# EAGLE board Cap-Dreh (EAGLE 3.55)

No outline drawn. Coordinates in mm, seen from the top.
Copper layers used: 

## Footprints (pad centres in the part's own frame; a part is rotated, then mirrored left to right if it is on the bottom)
8/1 = drill 1.422 pad 2.184 octagon:  -3.5,0;  3.5,0;  0,-3.5 | hole 3.81: 0,0
8/2 = drill 1.422 pad 2.184 octagon:  -2.5,2.54;  2.5,2.54;  0,-4.96 | hole 3.81: -0.04,0
8/3 = drill 1.422 pad 2.184 octagon:  -5,0;  5,0;  0,-5 | hole 3.81: 0,0

## Placement (x,y rotation side)
808/1  [8/1]  21.59,234.95 0 top
808/2  [8/2]  33.02,234.95 0 top
808/3  [8/3]  45.72,234.95 0 top
ST1  [-35SC]  0,0 0 top

## Library data of the parts
808/1-808/3 = cap-dreh
ST1 = BLATT